# Altium PCB CMSIS-DAPF103.PcbDoc (part 1 of 2)
Units mil, origin at the board's own origin, x right, y up, seen from the top; angles counter-clockwise.
Board outline 6000 x 4000 mil, 2 copper layers (Top Layer, Bottom Layer); 33 components, 24 nets, 133 pads, 37 vias.
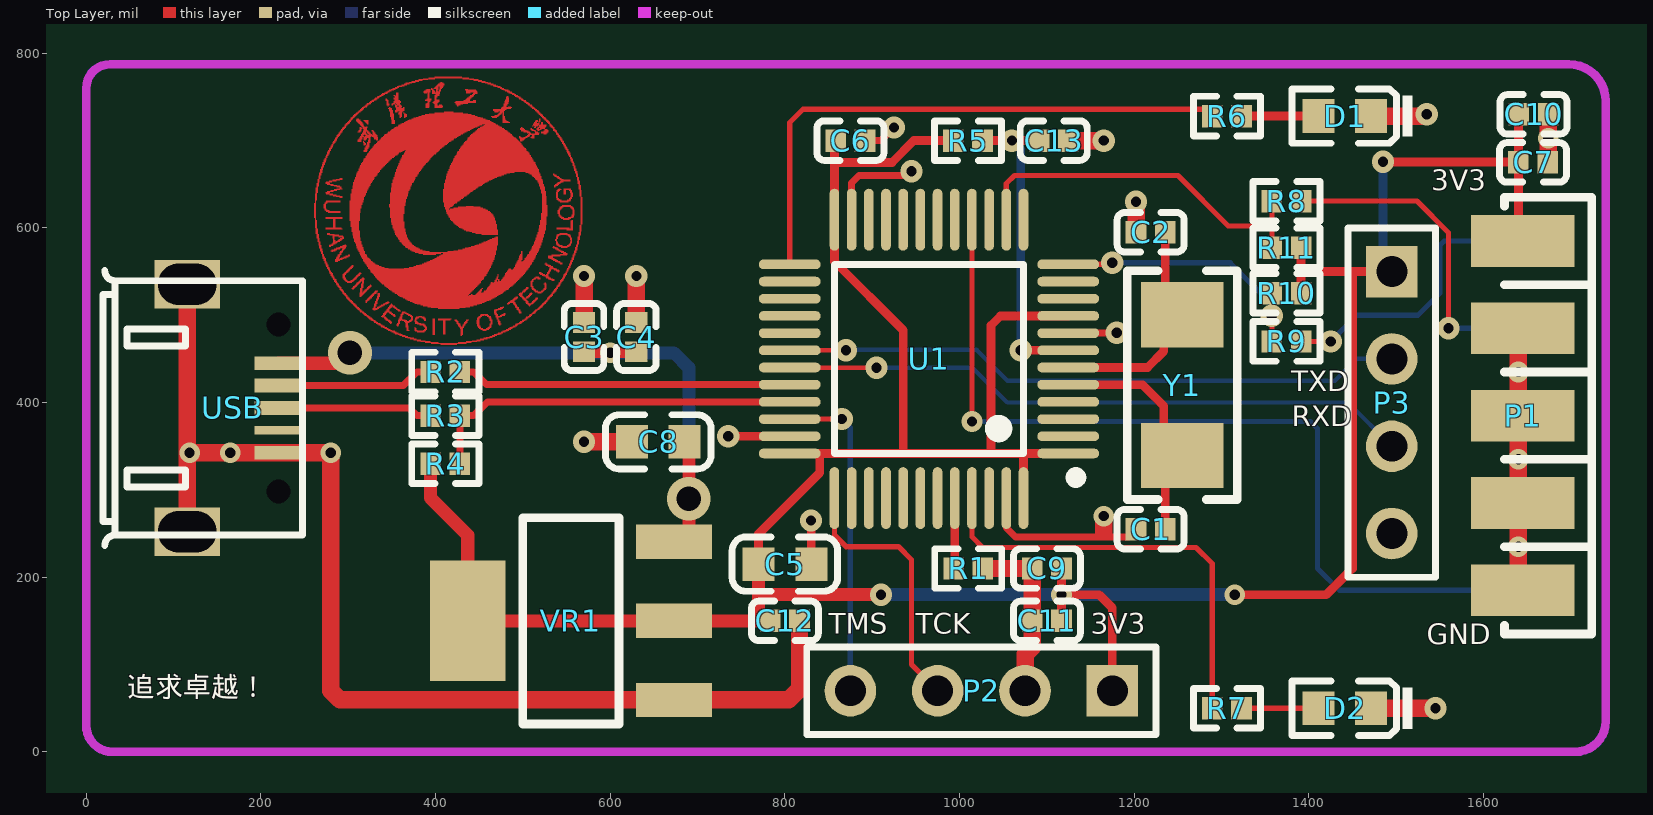
[diagram p0: Top Layer view]
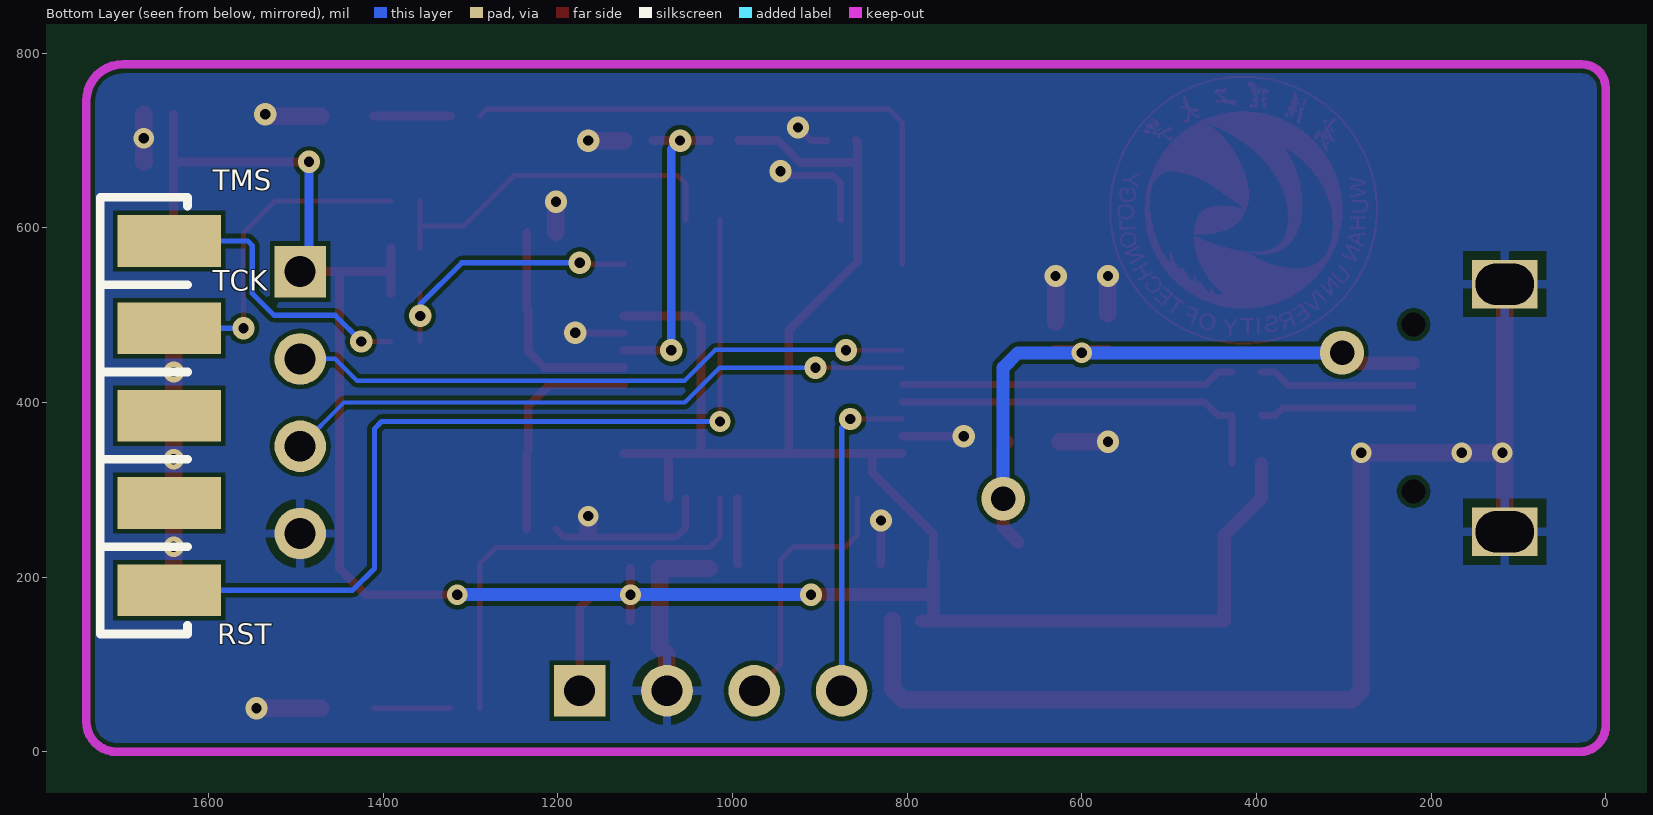
[diagram p1: Bottom Layer view, seen from below]

## Layer stack, top to bottom
Top Solder: solder mask 0.4, Solder Resist, Dk 3.5
Top Layer: signal copper 1.4
Dielectric 1: dielectric 12.6, FR-4, Dk 4.8
Bottom Layer: signal copper 1.4
Bottom Solder: solder mask 0.4, Solder Resist, Dk 3.5

## Board outline
-2088.86,-2445 3911.14,-2445 3911.14,1555 -2088.86,1555

## Design rules (kind name [scope] priority, off if disabled: settings)
Clearance [All] p1: gap=5 ignorepadtopadclearanceinfootprint=FALSE except(0: Arc-Hole Track-Hole SMDPad-Hole THPad-Hole Via-Hole Fill-Hole Poly-Hole Region-Hole Text-Hole; 10: Arc-Text Track-Text THPad-Text Via-Text Fill-Fill Fill-Poly Fill-Region Fill-Text Poly-Poly Poly-Region Poly-Text Region-Region Region-Text Text-Text)
DiffPairsRouting [All] p1: maxlimit=10 minlimit=10 mostfreqgap=10 toplayer_minwidth=8 toplayer_maxwidth=15 toplayer_prefwidth=15 bottomlayer_minwidth=8 bottomlayer_maxwidth=15 bottomlayer_prefwidth=15 maxuncoupledlength=500
PolygonConnect [All] p1: thpad.connectstyle=Relief thpad.reliefconductorwidth=10 thpad.reliefentries=4 thpad.polygonreliefangle="90 Angle" thpad.airgapwidth=10 smdpad.connectstyle=Relief smdpad.reliefconductorwidth=10 smdpad.reliefentries=4 smdpad.polygonreliefangle="90 Angle" smdpad.airgapwidth=10 via.connectstyle=Direct via.reliefconductorwidth=10 via.reliefentries=4 via.polygonreliefangle="90 Angle" via.airgapwidth=10
RoutingVias [All] p1: holewidth=28 width=50 viastyle="Through Hole" minholewidth=11.81 minwidth=17.72 maxholewidth=28 maxwidth=50
SolderMaskExpansion [All] p1: expansion=4
Width [All] p1: maxlimit=60 minlimit=5 preferedwidth=10 minimp=50.000000 maximp=50.000000 favimp=50.000000
29 further rules are at their usual default settings.

## Classes and differential pairs
differential pair USB1: +USB1_P -USB1_N
differential pair USB0: +USB0_P -USB0_N

## Components (designator, comment, footprint, x,y, rotation, side; value= is the part's Value field where it differs from the comment)
C1 "22pF (220) 5% 50V" 0402_C 1218.86,255 r180 top
C2 "22pF (220) 5% 50V" 0402_C 1218.86,595 r180 top
C3 "100nF (104) 10% 16V" 0402_C 570,475 r90 top
C4 "10uF (106) 20% 6.3V" 0402_C 630,475 r90 top
C5 "1uF (105) 10% 50V" 0603_C 800,215 r180 top
C6 "10uF (106) 20% 6.3V" 0402_C 875,700 r180 top
C7 "100nF (104) 10% 16V" 0402_C 1656.73,675 r180 top
C8 "1uF (105) 10% 50V" 0603_C 655,355 r0 top
C9 "100nF (104) 10% 16V" 0402_C 1100,210 r0 top
C10 "100nF (104) 10% 16V" 0402_C 1657.32,730 r180 top
C11 "100nF (104) 10% 16V" 0402_C 1100,150 r0 top
C12 "100nF (104) 10% 16V" 0402_C 800,150 r180 top
C13 "100nF (104) 10% 16V" 0402_C 1107.88,700 r180 top
D1 "绿灯 0603" 0603_LED_S1 1441.14,728.06 r180 top
D2 "黄灯 0603" 0603_LED_S1 1441.14,50 r180 top
P1 "Header 5X2A" "SMT HEADER 5*2" 1645,385 r0 top
P2 "Header 4" HDR1X4 1175,70 r180 top
P3 "Header 4" HDR1X4 1495,550 r270 top
R1 "0Ω (0R0) ±1%" 0402_R 1010,210 r0 top
R2 "22Ω (22R0) ±1%" 0402_R 411.14,435 r0 top
R3 "22Ω (22R0) ±1%" 0402_R 411.14,385 r0 top
R4 "1.5KΩ (1501) ±1%" 0402_R 411.14,330 r0 top
R5 "10KΩ (1002) ±1%" 0402_R 1009.61,700 r180 top
R6 "10KΩ (1002) ±1%" 0402_R 1306.14,728.06 r0 top
R7 "10KΩ (1002) ±1%" 0402_R 1306.14,50 r0 top
R8 "22Ω (22R0) ±1%" 0402_R 1374.41,630.67 r180 top
R9 "22Ω (22R0) ±1%" 0402_R 1374.41,470 r180 top
R10 "1KΩ (1001) ±1%" 0402_R 1374.41,525 r0 top
R11 "1KΩ (1001) ±1%" 0402_R 1374.41,577.09 r0 top
U1 "STM32F103C8T6" LQFP-48_7x7x05P 965,450 r90 top
USB "USB_5line" USB-MICRO-5P-2F 220,445 r90 top
VR1 "AMS1117-3.3" SOT-223 555,150 r0 top
Y1 "8MHz ±20ppm 20pF" SMD-5032_2P 1255,420 r270 top

## Footprints (in the part's own frame and the unit in brackets; to place one, negate y for a bottom-side part, rotate by r counter-clockwise, add the part's x,y. Pads: shape width x height; smd on the part's side, far side on the other; paste and mask are expansions set on the pad)
0402_C [mm]
  rect 0.6x0.65 smd mask+0.051: 1(-0.425,0) 2(0.425,0)
  silkscreen extent -0.97,-0.58 0.97,0.58, body extent -0.48,-0.3 0.52,0.3, height 0.2
0402_R [mm]
  rect 0.6x0.65 smd mask+0.051: 1(-0.425,0) 2(0.425,0)
  silkscreen extent -0.97,-0.58 0.97,0.58, body extent -0.57,-0.27 0.58,0.28, height 0.41
0603_C [mm]
  rect 0.93x0.98 smd: 1(-0.77,0) 2(0.77,0)
  silkscreen extent -1.53,-0.79 1.54,0.79, body extent -0.8,-0.4 0.8,0.4, height 0.3
0603_LED_S1 [mm]
  rect 0.93x0.98 smd: A(0.77,0) K(-0.77,0)
  silkscreen extent -1.98,-0.79 1.54,0.79, body extent -0.8,-0.4 0.8,0.4, height 0.6
HDR1X4 [mm] "Connector; Header; 4 Position"
  rect 1.5x1.5 hole 0.9: 1(0,0)
  round 1.5 hole 0.9: 2(2.54,0) 3(5.08,0) 4(7.62,0)
  silkscreen extent -1.27,-1.27 8.89,1.27, body extent -1.27,-1.27 8.89,1.27, height 7.58
LQFP-48_7x7x05P [mm]
  oval 0.28x1.8 smd mask+0.051: 1(-2.75,-4.05) 2(-2.25,-4.05) 3(-1.75,-4.05) 4(-1.25,-4.05) 5(-0.75,-4.05) 6(-0.25,-4.05) 7(0.25,-4.05) 8(0.75,-4.05) 9(1.25,-4.05) 10(1.75,-4.05) 11(2.25,-4.05) 12(2.75,-4.05) 25(2.75,4.05) 26(2.25,4.05) 27(1.75,4.05) 28(1.25,4.05) 29(0.75,4.05) 30(0.25,4.05) 31(-0.25,4.05) 32(-0.75,4.05) 33(-1.25,4.05) 34(-1.75,4.05) 35(-2.25,4.05) 36(-2.75,4.05)
  oval 1.8x0.28 smd mask+0.051: 13(4.05,-2.75) 14(4.05,-2.25) 15(4.05,-1.75) 16(4.05,-1.25) 17(4.05,-0.75) 18(4.05,-0.25) 19(4.05,0.25) 20(4.05,0.75) 21(4.05,1.25) 22(4.05,1.75) 23(4.05,2.25) 24(4.05,2.75) 37(-4.05,2.75) 38(-4.05,2.25) 39(-4.05,1.75) 40(-4.05,1.25) 41(-4.05,0.75) 42(-4.05,0.25) 43(-4.05,-0.25) 44(-4.05,-0.75) 45(-4.05,-1.25) 46(-4.05,-1.75) 47(-4.05,-2.25) 48(-4.05,-2.75)
  silkscreen extent -3.6,-4.43 2.75,2.75, body extent -4.5,-4.5 4.5,4.5, height 1.6
SMD-5032_2P [mm]
  rect 1.9x2.4 smd: 1(-2.05,0) 2(2.05,0)
  silkscreen extent -3.32,-1.6 3.32,1.6
"SMT HEADER 5*2" [mm]
  rect 3x1.5 smd: 1(0,5.08) 2(0,2.54) 3(0,0) 4(0,-2.54) 5(0,-5.08)
  rect 3x1.5 smd far side: 6(0,5.08) 7(0,2.54) 8(0,0) 9(0,-2.54) 10(0,-5.08)
  silkscreen extent -0.53,-6.35 2.01,6.35
SOT-223 [mm]
  rect 2.2x1 smd: 1(3,-2.3) 2(3,0) 3(3,2.3)
  rect 2.2x3.5 smd: 2(-3,0)
  silkscreen extent -1.4,-3 1.4,3, body extent -3.49,-3.24 3.49,3.24, height 1.64
USB-MICRO-5P-2F [mm]
  round 0 hole 0.7: 0(-3.725,0) 0(1.125,0)
  rect 0.4x1.4 smd: 1(0,0) 2(-0.65,0) 3(-1.3,0) 5(-2.6,0)
  rect 0.254x1.4 smd: 4(-1.95,0)
  rect 1.4x1.9 hole 1.2 slot 1.7 at 90 deg: 6(2.3,2.65) 7(-4.9,2.65)
  silkscreen extent -5.3,-0.7 2.7,5.1

## Part data
C1 C2: library part "0402 22pF (220) 5% 50V", "贴片电容", Package=0402, SuppliersPartNumber=C1555, ComponentLink1Description=供应商, ComponentLink1URL=http://www.szlcsc.com/product/details_1907.html, Supplier=LC
C3 C7 C9 C10 C11 C12 C13: library part "0402 100nF (104) 10% 16V", "贴片电容", Package=0402, SuppliersPartNumber=C1525, ComponentLink1Description=供应商, ComponentLink1URL=http://www.szlcsc.com/product/details_1877.html, Supplier=LC
C4 C6: library part "0402 10uF (106) 20% 6.3V", "贴片电容", Package=0402, SuppliersPartNumber=C15525, ComponentLink1Description=供应商, ComponentLink1URL=http://www.szlcsc.com/product/details_16204.html, Supplier=LC
C5 C8: library part "0603 1uF (105) 10% 50V", "贴片电容", Package=0603, SuppliersPartNumber=C15849, ComponentLink1Description=供应商, ComponentLink1URL=http://www.szlcsc.com/product/details_16531.html, Supplier=LC
D1: library part "0603 绿灯", "发光二极管", Package=0603, SuppliersPartNumber=C72043, ComponentLink1Description=供应商, ComponentLink1URL=http://www.szlcsc.com/product/details_73152.html, Supplier=LC
D2: library part "0603 黄灯", "发光二极管", Package=0603, SuppliersPartNumber=C72038, ComponentLink1Description=供应商, ComponentLink1URL=http://www.szlcsc.com/product/details_73147.html, Supplier=LC
P1: "Header, 5-Pin, Dual row", LatestRevisionDate=17-Jul-2002, LatestRevisionNote="Re-released for DXP Platform.", Publisher="Altium Limited"
P2 P3: "Header, 4-Pin", LatestRevisionDate=17-Jul-2002, LatestRevisionNote="Re-released for DXP Platform.", Publisher="Altium Limited"
R1: library part "0402 0Ω (0R0) 1%", "贴片电阻", Package=0402, SuppliersPartNumber=C17168, ComponentLink1Description=供应商, ComponentLink1URL=http://www.szlcsc.com/product/details_17853.html, Supplier=LC
R2 R3 R8 R9: library part "0402 22Ω (22R0) 1%", "贴片电阻", Package=0402, SuppliersPartNumber=C25092, ComponentLink1Description=供应商, ComponentLink1URL=http://www.szlcsc.com/product/details_25835.html, Supplier=LC
R4: library part "0402 1.5KΩ (1501) 1%", "贴片电阻", Package=0402, SuppliersPartNumber=C25867, ComponentLink1Description=供应商, ComponentLink1URL=http://www.szlcsc.com/product/details_26610.html, Supplier=LC
R5 R6 R7: library part "0402 10KΩ (1002) 1%", "贴片电阻", Package=0402, SuppliersPartNumber=C25744, ComponentLink1Description=供应商, ComponentLink1URL=http://www.szlcsc.com/product/details_26487.html, Supplier=LC
R10 R11: library part "0402 1KΩ (1001) 1%", "贴片电阻", Package=0402, SuppliersPartNumber=C11702, ComponentLink1Description=供应商, ComponentLink1URL=http://www.szlcsc.com/product/details_12256.html, Supplier=LC
U1: "ARM", Package=LQFP-48_7x7x05P, SuppliersPartNumber=C8734, ComponentLink1Description=供应商, ComponentLink1URL=http://www.szlcsc.com/product/details_9243.html, Supplier=LC
VR1: library part "SOT-223 AMS1117-3.3", "低压差线性稳压(LDO)", Package=SOT-223, SuppliersPartNumber=C6186, ComponentLink1Description=供应商, ComponentLink1URL=http://www.szlcsc.com/product/details_6652.html, Supplier=LC
Y1: library part "SMD-5032_2P 8MHz 20ppm 20pF", "贴片晶振", Package=SMD-5032_2P, SuppliersPartNumber=C115962, ComponentLink1Description=供应商, ComponentLink1URL=http://www.szlcsc.com/product/details_117214.html, Supplier=LC

## Via types
v1: diameter 25.59, hole 11.81, Top Layer to Bottom Layer, tented both sides, 23 vias
v2: diameter 23.62, hole 11.81, Top Layer to Bottom Layer, tented both sides, 12 vias
v3: diameter 50, hole 28, Top Layer to Bottom Layer, tented both sides, 2 vias

## Nets (pads, with @x,y where several pads share a name; then routed paths per layer and width w, separated by ;. In a path a pad name is that pad's centre, name@x,y a point inside that pad or via, vN(x,y) a via of type N, cw(c..) or ccw(c..) an arc to the next point about the centre after c; other vN are vias at no path point)
3V3: C5.2 C6.2 C7.2 C9.2 C10.2 C11.2 C12.2 P1.1 P2.1 P3.1 R4.1 R5.2 R10.2 R11.2 U1.1 U1.9 U1.24 U1.36 U1.48 VR1.2 | length 3754.3
  Top Layer w10: C5.2@769.68,215 769.68,249.37 840,319.69 U1.36@840,341.73 ; U1.36@805.55,341.73 U1.36@840,341.73 ; C6.2@858.27,700 856.73,698.46 856.73,675 ; R5.2@992.88,700 947.76,700 922.76,675 856.73,675 ; U1.48@1073.27,290.55 1073.27,340 1075,341.73 ; C11.2@1116.73,150 v2(1116.73,180) ; C9.2@1116.73,210 v2(1116.73,180) ; U1.1@1124.45,341.73 1075,341.73 ; U1.9@1124.45,499.21 1046.97,499.21 1036.02,488.27 1036.02,342.76 1035,341.73 ; P2.1@1175,70 1175,165 1160,180 v2(1116.73,180) ; v2(1315,180) 1420,180 1440,200 1450,210 1450,550 ; R10.2@1391.14,525 1391.14,551.04 ; R11.2@1391.14,577.09 1391.14,551.04 ; v1(1485,675.59) 1639.41,675.59 C7.2@1640,675 ; P3.1@1495,550 1450,550 ; P1.1@1640,585 C7.2@1640,675 ; C10.2@1640,730 C7.2@1640,675 ; U1.36@840,341.73 935,341.73 ; 856.73,675 U1.24@856.73,609.45 856.73,561.54 935.47,482.8 935.47,342.2 935,341.73 ; 935,341.73 1035,341.73 ; 1035,341.73 1075,341.73 ; 1391.14,551.04 1392.19,550 1450,550
  Top Layer w15: R4.1@394.41,330 394.41,290.59 436.89,248.11 VR1.2@436.89,150 VR1.2@673.11,150 765,150 ; C5.2@769.68,215 769.68,180 ; C12.2@783.27,150 765,150 ; v1(910,180) 769.68,180 ; 765,150 769.68,154.69 769.68,180
  Bottom Layer w10: v1(1485,675.59) 1485,560 P3.1@1495,550
  Bottom Layer w15: v1(910,180) v2(1116.73,180) v2(1315,180)
+5: C3.1 C4.1 C8.2 USB.1 VR1.3 | length 842.3
  Top Layer w15: USB.1@220,445 290,445 v3(301.95,456.95) v3@313.9,468.9 ; C3.1@570,458.27 C4.1@630,458.27 ; VR1.3@673.11,240.55 690,257.44 v3(690,290) 690,350.32 C8.2@685.32,355
  Bottom Layer w15: v3(301.95,456.95) v2(600,456.95) 673.05,456.95 690,440 v3(690,290) v3@690,280
GND: C1.2 C2.2 C3.2 C4.2 C5.1 C6.1 C7.1 C8.1 C9.1 C10.1 C11.1 C12.1 C13.1 D1.K D2.K P1.2 P1.3 P1.4 P1.5 P2.2 P3.4 R1.2 U1.8 U1.23 U1.35 U1.47 USB.5 USB.6 USB.7 VR1.1 | length 2806.3
  Top Layer w8: U1.23@876.42,609.45 876.42,651.42 885,660 940,660 v1(945,665) ; C6.1@891.73,700 910,700 v1(925,715) ; U1.47@1053.58,290.55 1053.58,256.42 1063.88,246.12 1193.24,246.12 C1.2@1202.12,255 ; U1.8@1124.45,479.53 1179.53,479.53 v1(1180,480)
  Top Layer w10: v1(735,361.42) U1.35@805.55,361.42 ; v1(830,265) 830.32,264.69 C5.1@830.32,215
  Top Layer w20: USB.7@115.67,252.09 v2@115.67,340 ; USB.6@115.67,535.55 v2@115.67,340 ; v1(570,355) C8.1@624.68,355 ; C3.2@570,501.73 v1(570,545) ; C4.2@630,491.73 v1(630,545) ; C12.1@816.73,150 816.73,71.73 804.45,59.45 VR1.1@673.11,59.45 290.55,59.45 280,70 v2(280,342.64) USB.5@220,342.64 v2(165,342.64) v2(118.31,342.64) v2@115.67,340 ; R1.2@1026.73,210 C9.1@1083.27,210 C11.1@1083.27,150 1083.27,120 1075,111.73 P2.2@1075,70 ; C13.1@1124.61,700 v1(1165,700) ; 1165,252.12 v2(1165,270) ; C2.2@1202.12,595 v1(1202.12,630) ; D2.K@1471.46,50 v1(1545,50) ; D1.K@1471.46,728.06 1533.06,728.06 v1(1535,730) ; P1.5@1640,185 1640,285 1640,385 P1.2@1640,485 ; C7.1@1673.46,675 1674.05,675.59 C10.1@1674.05,730
  other v2: 1640,235 1640,335 1640,435 1674.05,702.79
LED1: R6.1 U1.25 | length 655.7
  Top Layer w6: U1.25@805.55,558.27 805.55,720.55 820.8,735.8 1281.68,735.8 R6.1@1289.41,728.06
LED2: R7.1 U1.45 | length 497.7
  Top Layer w6: U1.45@1014.21,290.55 1014.21,246.34 1026.43,234.12 1270.88,234.12 1289.41,215.59 R7.1@1289.41,50
NetC1_1: C1.1 U1.5 Y1.2 | length 261.3
  Top Layer w10: U1.5@1124.45,420.47 1209.53,420.47 1233.86,396.14 1233.86,344.29 1235.59,342.56 C1.1@1235.59,255
NetC2_1: C2.1 U1.6 Y1.1 | length 254
  Top Layer w10: U1.6@1124.45,440.16 1215.16,440.16 1233.86,458.86 1233.86,505.71 1235.59,507.44 C2.1@1235.59,595
NetD1_A: D1.A R6.2 | length 88
  Top Layer w10: R6.2@1322.88,728.06 D1.A@1410.83,728.06
NetD2_A: D2.A R7.2 | length 88
  Top Layer w6: R7.2@1322.88,50 D2.A@1410.83,50
NetP1_6: P1.6 R9.1 | length 328.7
  Top Layer w6: R9.1@1391.14,470 v1(1425,470)
  Bottom Layer w6: v1(1425,470) 1455,500 1525,500 1550,525 1550,580 1555,585 P1.6@1640,585
NetP1_7: P1.7 R8.1 | length 373.3
  Top Layer w6: R8.1@1391.14,630.67 1523.78,630.67 1560,594.45 v1(1560,485)
  Bottom Layer w6: v1(1560,485) P1.7@1640,485
NetR1_1: R1.1 U1.44 | length 76.1
  Top Layer w10: R1.1@993.27,215 994.53,216.26 U1.44@994.53,290.55
nRST: C13.2 R5.1 U1.7 | length 363.5
  Top Layer w10: R5.1@1026.34,700 C13.2@1091.14,700 ; v1(1070,460) 1070.16,459.84 U1.7@1124.45,459.84
  Bottom Layer w10: v1(1060,700) 1070,690 v1(1070,460)
RST: P1.10 U1.16 | length 1030.7
  Top Layer w6: v2(1014.21,378.27) U1.16@1014.21,609.45
  Bottom Layer w6: v2(1014.21,378.27) 1401.73,378.27 1410,370 1410,210 1435,185 P1.10@1640,185
RXD: P3.3 U1.31 | length 727.3
  Top Layer w5: U1.31@805.55,440.16 805.55,439.7 904.7,439.7 v1(905,440)
  Bottom Layer w5: v1(905,440) 1014.7,440 1054.7,400 1445,400 P3.3@1495,350
SWCLK: P2.3 U1.37 | length 304.7
  Top Layer w6: U1.37@856.73,290.55 856.73,248.27 870,235 930,235 945,220 945,100 P2.3@975,70
SWDIO: P2.4 U1.34 | length 374.7
  Top Layer w6: U1.34@805.55,381.1 v1(865,381.1)
  Bottom Layer w6: v1(865,381.1) 875,371.1 P2.4@875,70
TCK/CK: R8.2 R11.1 U1.14 | length 426.7
  Top Layer w6: U1.14@1053.58,609.45 1053.58,650.71 1062.87,660 1250,660 1307.68,602.32 1357.68,602.32 ; R11.1@1357.68,577.09 1357.68,602.32 ; R8.2@1357.68,630.67 1357.68,602.32
TMS/IO: R9.2 R10.1 U1.12 | length 321.8
  Top Layer w6: U1.12@1124.45,558.27 1173.27,558.27 v1(1175,560) ; R9.2@1357.68,470 v1(1357.68,499.21) R10.1@1357.68,525
  Bottom Layer w6: v1(1175,560) 1310,560 1357.68,512.32 v1(1357.68,499.21)
TXD: P3.2 U1.30 | length 714.6
  Top Layer w5: U1.30@805.55,459.84 v1@869.84,459.84
  Top Layer w8: v1@869.84,459.84 v1(870,460)
  Bottom Layer w5: v1(870,460) 870.3,460.3 1019.7,460.3 1055,425 1430,425 1455,450 P3.2@1495,450
USB0_N: R2.1 USB.2 | length 180.9
  Top Layer w8: USB.2@220,419.41 363.01,419.41 378.6,435 R2.1@394.41,435
USB0_P: R3.1 USB.3 | length 178.1
  Top Layer w8: USB.3@220,393.82 369.78,393.82 378.6,385 R3.1@394.41,385
USB1_N: R2.2 U1.32 | length 383.7
  Top Layer w8: R2.2@427.88,435 443.69,435 458.21,420.47 U1.32@805.55,420.47
USB1_P: R3.2 R4.2 U1.33 | length 439.2
  Top Layer w8: R4.2@427.88,330 R3.2@427.88,385 443.69,385 459.47,400.79 U1.33@805.55,400.79
pads on no net: P1.8 P1.9 U1.2 U1.3 U1.4 U1.10 U1.11 U1.13 U1.15 U1.17 U1.18 U1.19 U1.20 U1.21 U1.22 U1.26 U1.27 U1.28 U1.29 U1.38 U1.39 U1.40 U1.41 U1.42 U1.43 U1.46 USB.0 USB.4